# Altium PCB ExtendBoard.PcbDoc
Units mm, origin at the board's own origin, x right, y up, seen from the top; angles counter-clockwise.
Board outline 31.39 x 33.49 mm, 2 copper layers (Top1, Bottom4), stack 1.071 mm thick; 1 components, 7 nets, 22 pads, 2 vias.
Unrouted connection lines stored in the file: 56.
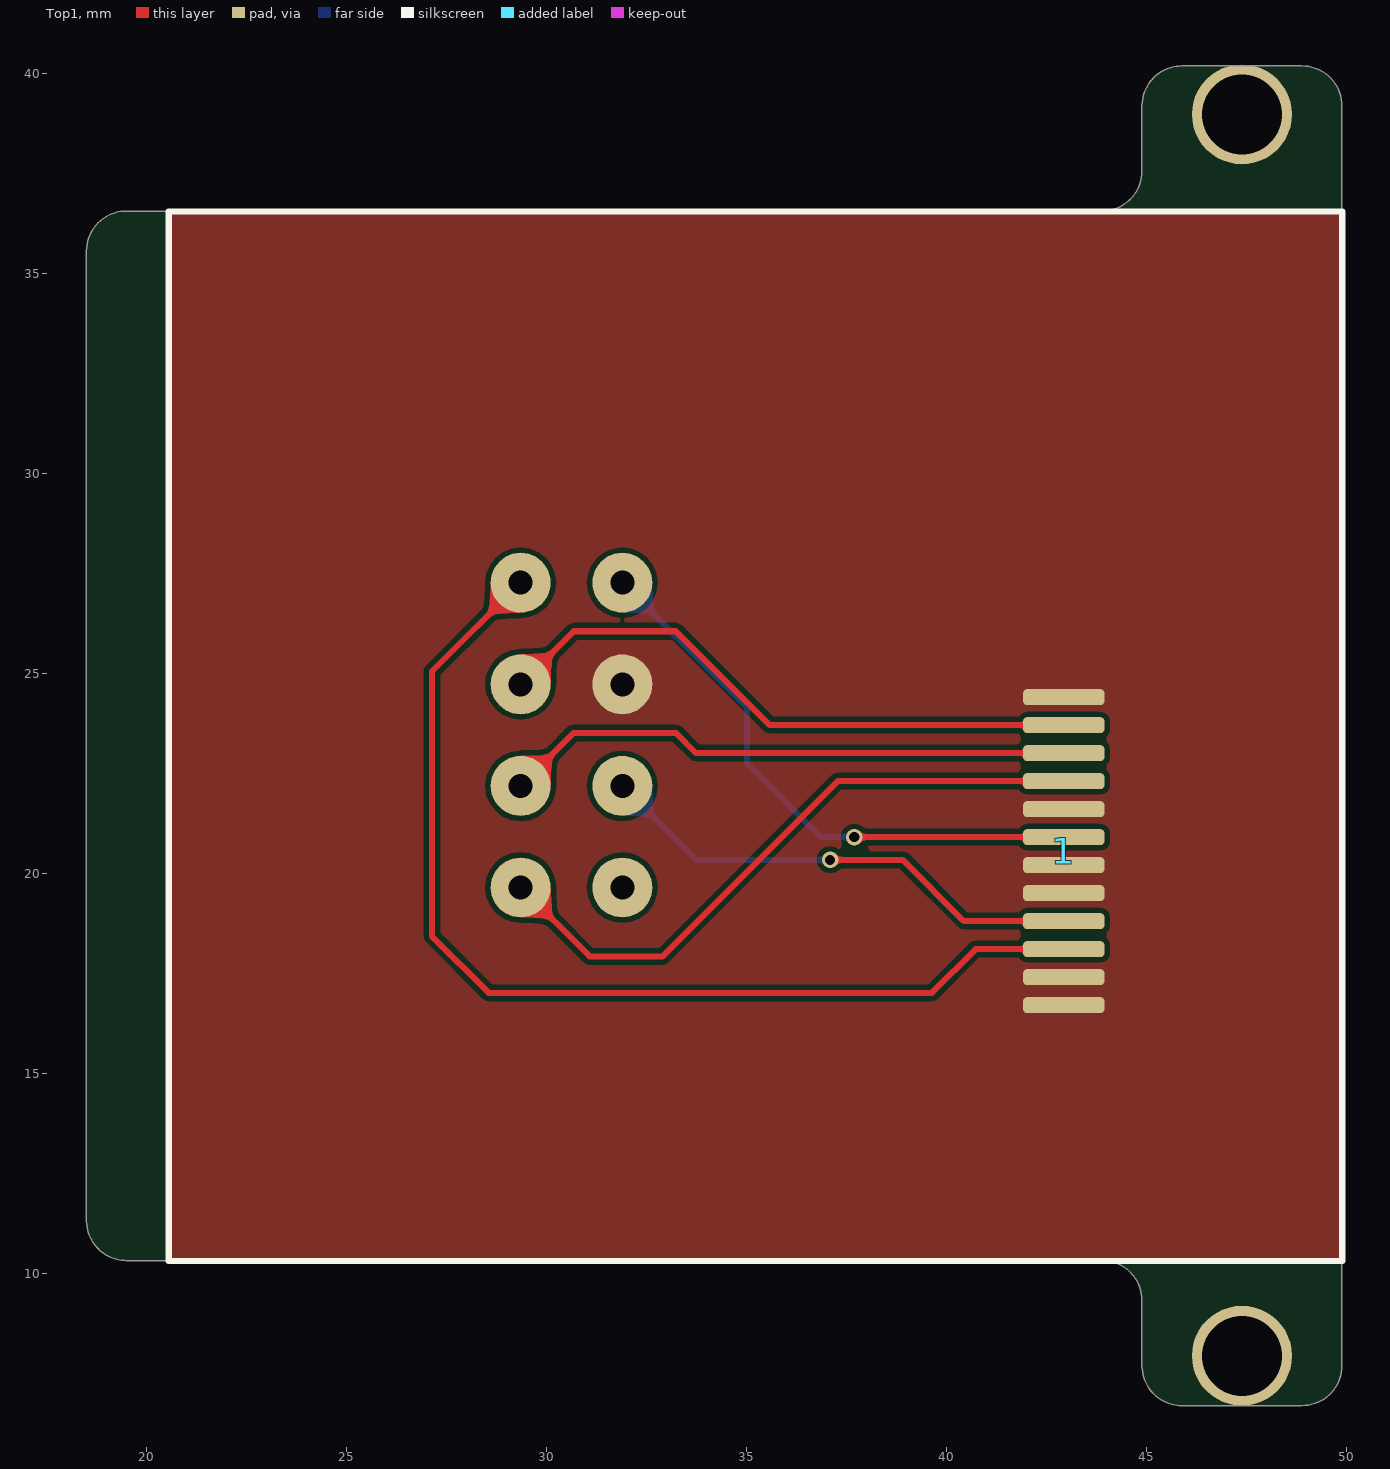
[diagram p0: Top1 view]
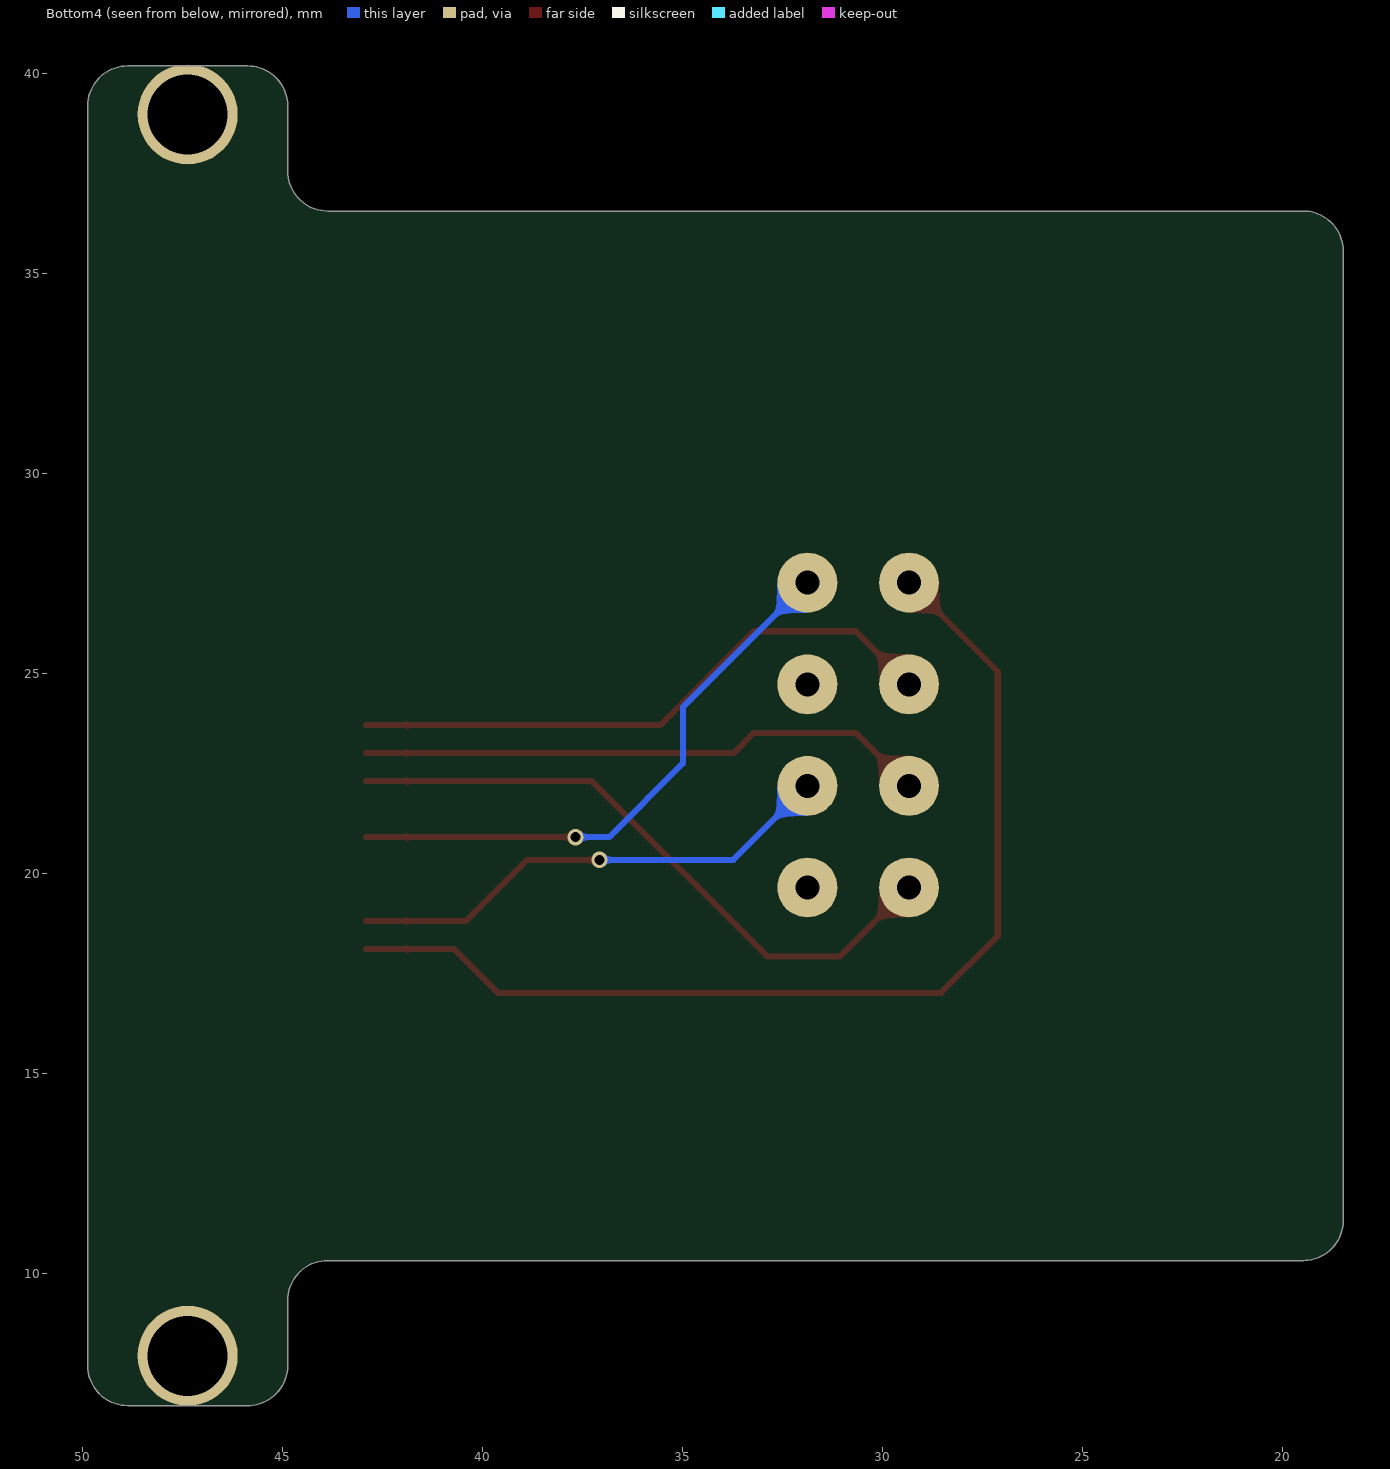
[diagram p1: Bottom4 view, seen from below]

## Layer stack, top to bottom
Top Solder: solder mask 0.0102, Solder Resist, Dk 3.5
Top1: signal copper 0.0356
Dielectric 2: core 1, PP-006, Dk 4.2
Bottom4: signal copper 0.0356
Bottom Solder: solder mask 0.0102, Solder Resist, Dk 3.5

## Board outline
20.491,10.328 43.879,10.328 cw(c43.879,9.328) 43.961,10.325 cw(c43.879,9.328) 44.879,9.328 44.879,7.702 ccw(c45.879,7.702) 45.751,6.71 ccw(c45.879,7.702) 45.879,6.702 48.879,6.702 ccw(c48.879,7.702) 49.879,7.702 49.879,39.194 ccw(c48.879,39.194) 48.879,40.194 45.879,40.194 ccw(c45.879,39.194) 45.59,40.151 ccw(c45.879,39.194) 44.879,39.194 44.879,37.567 cw(c43.879,37.567) 44.13,36.598 cw(c43.879,37.567) 43.879,36.567 19.491,36.567 ccw(c19.491,35.567) 19.135,36.501 ccw(c19.491,35.567) 18.491,35.567 18.491,11.328 ccw(c19.491,11.328) 19.372,10.336 ccw(c19.491,11.328) 19.491,10.328

## Design rules (kind name [scope] priority, off if disabled: settings)
Clearance [All] p1: gap=0.127 ignorepadtopadclearanceinfootprint=FALSE
ComponentClearance [All] p1: gap=0 collisioncheckmode=3 verticalgap=0 showdistances=FALSE
DiffPairsRouting [All] p1: maxlimit=0.229 minlimit=0.229 mostfreqgap=0.229 toplayer_minwidth=0.102 toplayer_maxwidth=0.102 toplayer_prefwidth=0.102 bottomlayer_minwidth=0.102 bottomlayer_maxwidth=0.102 bottomlayer_prefwidth=0.102 maxuncoupledlength=12.7
FanoutControl Fanout_BGA [All] p1: bgadir=Out bgaviamode=Centered fanoutstyle=Auto fanoutdirection=Alternating viagrid=0.025 // Fanout_BGA (Default Rule)
HoleSize [All] p1: absolutevalues=TRUE maxlimit=254 minlimit=0.203 maxpercent=80.000 minpercent=20.000
MinimumSolderMaskSliver [All] p1 off: minsoldermaskwidth=0.051
PlaneClearance [All] p1: clearance=0.203
PlaneConnect [All] p1: planeconnectstyle=Direct reliefexpansion=0.508 reliefentries=4 reliefconductorwidth=0.254 reliefairgap=0.254
PolygonConnect [All] p1: connectstyle=Direct reliefconductorwidth=0.254 reliefentries=4 polygonreliefangle="90 Angle" airgapwidth=0.254
RoutingVias [All] p1: holewidth=0.203 width=0.406 viastyle="Through Hole" minholewidth=0.152 minwidth=0.305 maxholewidth=0.711 maxwidth=1.27
SilkToBoardRegionClearance [All] p1 off:
SilkToSilkClearance [All] p1: silktosilkclearance=0
SilkToSolderMaskClearance [IsPad] p1: minsilkscreentomaskgap=0 clearancetoexposedcopper=TRUE
SolderMaskExpansion [All] p1: expansion=0.076 istentingtop=FALSE
Width [All] p1: maxlimit=254 minlimit=0.102 preferedwidth=0.102
20 further rules are at their usual default settings.

## Components (designator, comment, footprint, x,y, rotation, side; value= is the part's Value field where it differs from the comment)
1 "LCD-240x240" LCD-240X240-NOHOLE 37.668,23.876 r270 bottom locked

## Footprints (in the part's own frame and the unit in brackets; to place one, negate y for a bottom-side part, rotate by r counter-clockwise, add the part's x,y. Pads: shape width x height; smd on the part's side, far side on the other; paste and mask are expansions set on the pad)
LCD-240X240-NOHOLE [mil]
  rrect50% 15.75x80 smd far side: 1(282,-207) 2(254.44,-207) 3(226.88,-207) 4(199.32,-207) 5(171.76,-207) 6(144.2,-207) 7(116.65,-207) 8(89.09,-207) 9(61.53,-207) 10(33.97,-207) 11(6.41,-207) 12(-21.15,-207)
  body extent -499,-565 534,673, height 20

## Part data
1: "显示屏"

## Free pads (board coordinates)
  round 1.5 hole 0.6: ""(29.347,19.654) ""(29.347,22.194) ""(29.347,24.734) ""(29.347,27.274) ""(31.887,19.654) ""(31.887,22.194) ""(31.887,24.734) ""(31.887,27.274)
  round 2.5 hole 2: ""(47.379,7.947) ""(47.379,38.981)

## Via types
v1: diameter 0.406, hole 0.254, Top1 to Bottom4, tented both sides, 2 vias

## Nets (pads, with @x,y where several pads share a name; then routed paths per layer and width w, separated by ;. In a path a pad name is that pad's centre, name@x,y a point inside that pad or via, vN(x,y) a via of type N, cw(c..) or ccw(c..) an arc to the next point about the centre after c; other vN are vias at no path point)
3V3: 1.4 pad.@31.887,22.194 | length 12.4
  Top1 w0.152: v1(37.084,20.345) 38.896,20.345 40.429,18.813 1.4
  Bottom4 w0.152: pad.@31.887,22.194 33.736,20.345 v1(37.084,20.345)
DC: 1.7 pad.@31.887,27.274 | length 14.5
  Top1 w0.152: v1(37.685,20.913) 1.7
  Bottom4 w0.152: pad.@31.887,27.274 35.001,24.16 35.001,22.758 36.846,20.913 v1(37.685,20.913)
GND: 1.1 1.2 1.5 1.6 1.8 1.12 pad.@31.887,24.734
LCD_BL_VCC: 1.3 pad.@29.347,27.274 | length 26.6
  Top1 w0.152: pad.@29.347,27.274 27.127,25.054 27.127,18.44 28.55,17.018 39.624,17.018 40.719,18.113 1.3
MOSI: 1.10 pad.@29.347,22.194 | length 14.3
  Top1 w0.152: pad.@29.347,22.194 30.673,23.52 33.223,23.52 33.73,23.013 1.10
RES: 1.11 pad.@29.347,24.734 | length 15.1
  Top1 w0.152: pad.@29.347,24.734 30.673,26.06 33.223,26.06 35.57,23.713 1.11
SCK: 1.9 pad.@29.347,19.654 | length 16.1
  Top1 w0.152: pad.@29.347,19.654 31.069,17.932 32.894,17.932 37.275,22.313 1.9

## Polygon pours and split planes (outlines as drawn)
GND on Top1 "GND_L01_P000" (solid, remove dead copper, pour order 0): 20.523,36.551 49.911,36.551 49.911,10.312 20.523,10.312

## Silkscreen, mask and mechanical layers (free items; w line width, h text height)
Mechanical 1:
  lines w0.152: 18.491,11.328 18.491,35.567 ; 19.491,10.328 20.491,10.328 43.879,10.328 ; 19.491,36.567 43.879,36.567 ; 44.879,7.702 44.879,9.328 ; 44.879,37.567 44.879,39.194 ; 45.879,6.702 47.379,6.702 48.879,6.702 ; 45.879,40.194 47.065,40.194 47.693,40.194 48.879,40.194 ; 49.879,7.702 49.879,39.194
  lines w0.254: 18.491,11.328 ccw(c19.491,11.328) 19.372,10.336 ccw(c19.491,11.328) 19.491,10.328 ; 18.491,35.567 cw(c19.491,35.567) 19.135,36.501 cw(c19.491,35.567) 19.491,36.567 ; 43.879,10.328 cw(c43.879,9.328) 43.961,10.325 cw(c43.879,9.328) 44.879,9.328 ; 43.879,36.567 ccw(c43.879,37.567) 44.13,36.598 ccw(c43.879,37.567) 44.879,37.567 ; 44.879,7.702 ccw(c45.879,7.702) 45.751,6.71 ccw(c45.879,7.702) 45.879,6.702 ; 44.879,39.194 cw(c45.879,39.194) 45.59,40.151 cw(c45.879,39.194) 45.879,40.194 ; 48.879,6.702 ccw(c48.879,7.702) 49.879,7.702 ; 48.879,40.194 cw(c48.879,39.194) 49.879,39.194
Drill Drawing:
  circle w0.254: c20.209,56.663 r0.847
  lines w0.254: 19.362,48.62 19.786,48.62 20.209,48.197 20.632,48.62 21.056,48.62 20.632,49.043 21.056,49.466 20.632,49.466 20.209,49.89 19.786,49.466 19.362,49.466 19.786,49.043 19.362,48.62 ; 19.362,53.7 21.056,53.7 20.209,52.006 19.362,53.7
  lines w0.381: 17.843,47.053 334.697,47.053 ; 17.843,58.483 334.697,58.483 ; 31.836,43.243 31.836,62.293 ; 45.294,43.243 45.294,62.293 ; 73.226,43.243 73.226,62.293 ; 86.075,43.243 86.075,62.293 ; 104.714,43.243 104.714,62.293 ; 134.931,43.243 134.931,62.293 ; 149.913,43.243 149.913,62.293 ; 168.857,43.243 168.857,62.293 ; 187.647,43.243 187.647,62.293 ; 209.333,43.243 209.333,62.293 ; 243.207,43.243 243.207,62.293 ; 277.08,43.243 277.08,62.293 ; 299.071,43.243 299.071,62.293 ; 17.843,43.243 334.697,43.243 334.697,62.293 17.843,62.293 17.843,43.243
  text "Symbol" at 20.13,59.627 h1.83
  text "Count" at 32.979,59.627 h1.83
  text "Hole Size" at 46.437,59.627 h1.83
  text "Plated" at 74.369,59.627 h1.83
  text "Hole Type" at 87.218,59.627 h1.83
  text "Drill Layer Pair" at 105.857,59.627 h1.83
  text "Via/Pad" at 136.074,59.627 h1.83
  text "Pad Shape" at 151.056,59.627 h1.83
  text "Template" at 170,59.627 h1.83
  text "Description" at 188.79,59.627 h1.83
  text "Hole Tolerance (+)" at 210.476,59.627 h1.83
  text "Hole Tolerance (-)" at 244.35,59.627 h1.83
  text "Hole Length" at 278.223,59.627 h1.83
  text "Routed Path Length" at 300.214,59.627 h1.83
  text "2" at 32.979,55.816 h1.52
  text "10.00mil (0.254mm)" at 46.437,55.816 h1.52
  text "PTH" at 74.369,55.816 h1.52
  text "Round" at 87.218,55.816 h1.52
  text "Top1 - Bottom4" at 105.857,55.816 h1.52
  text "Via" at 136.074,55.816 h1.52
  text "Rounded" at 151.056,55.816 h1.52
  text "v41h25m0mx0" at 170,55.816 h1.52
  text "-" at 278.223,55.816 h1.52
  text "-" at 300.214,55.816 h1.52
  text "2" at 32.979,52.006 h1.52
  text "78.74mil (2.000mm)" at 46.437,52.006 h1.52
  text "PTH" at 74.369,52.006 h1.52
  text "Round" at 87.218,52.006 h1.52
  text "Top1 - Bottom4" at 105.857,52.006 h1.52
  text "Pad" at 136.074,52.006 h1.52
  text "Rounded" at 151.056,52.006 h1.52
  text "c250h200" at 170,52.006 h1.52
  text "-" at 278.223,52.006 h1.52
  text "-" at 300.214,52.006 h1.52
  text "8" at 32.979,48.197 h1.52
  text "23.62mil (0.600mm)" at 46.437,48.197 h1.52
  text "PTH" at 74.369,48.197 h1.52
  text "Round" at 87.218,48.197 h1.52
  text "Top1 - Bottom4" at 105.857,48.197 h1.52
  text "Pad" at 136.074,48.197 h1.52
  text "Rounded" at 151.056,48.197 h1.52
  text "c150h60" at 170,48.197 h1.52
  text "-" at 278.223,48.197 h1.52
  text "-" at 300.214,48.197 h1.52
  text "12 Total" at 32.979,44.386 h1.52